# Altium PCB PCB1.PcbDoc
Units mm, origin at the board's own origin, x right, y up, seen from the top; angles counter-clockwise.
Board outline 100 x 85 mm, 2 copper layers (Top Layer, Bottom Layer); 80 components, 34 nets, 200 pads, 33 vias.
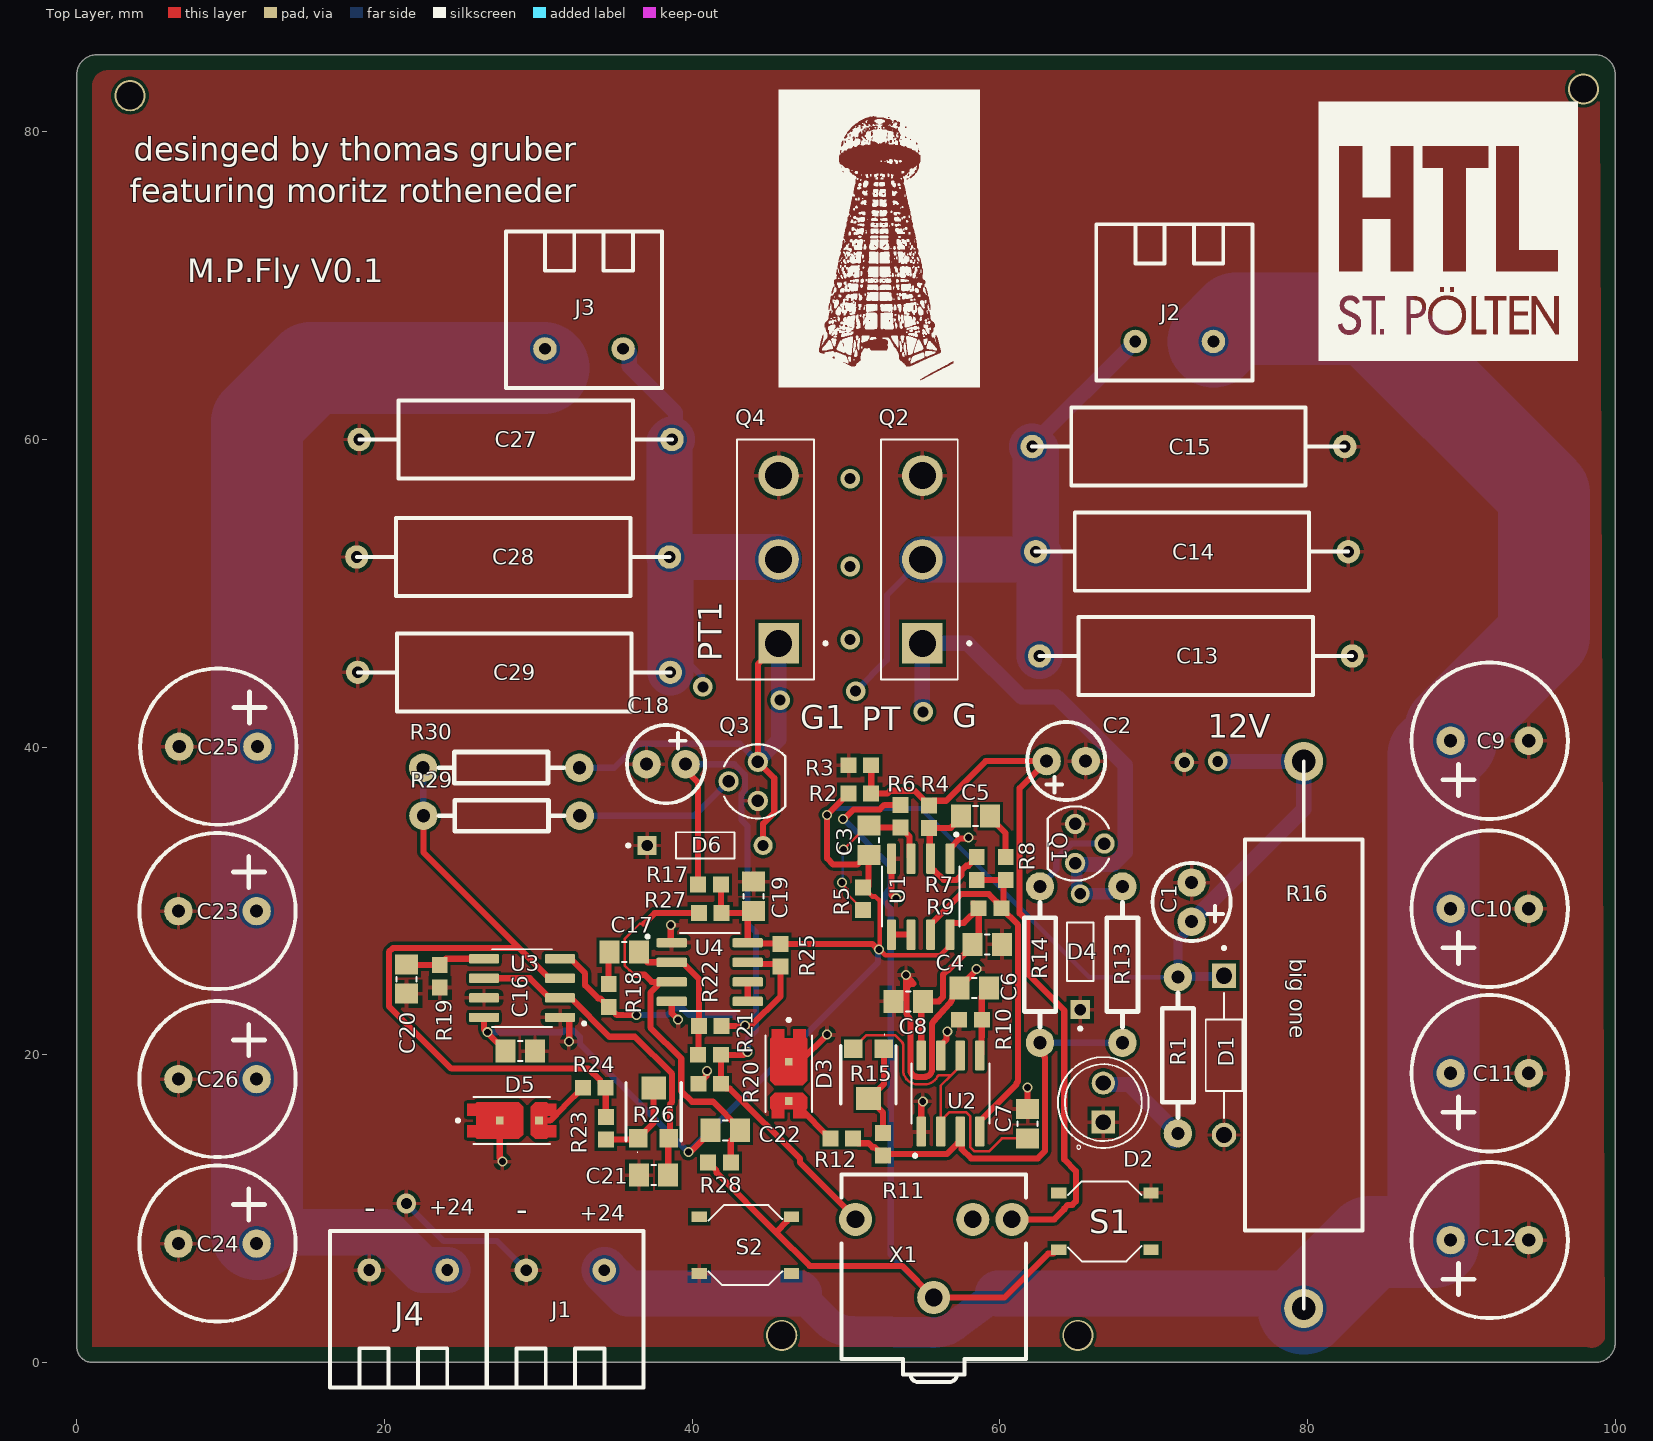
[diagram p0: Top Layer view]
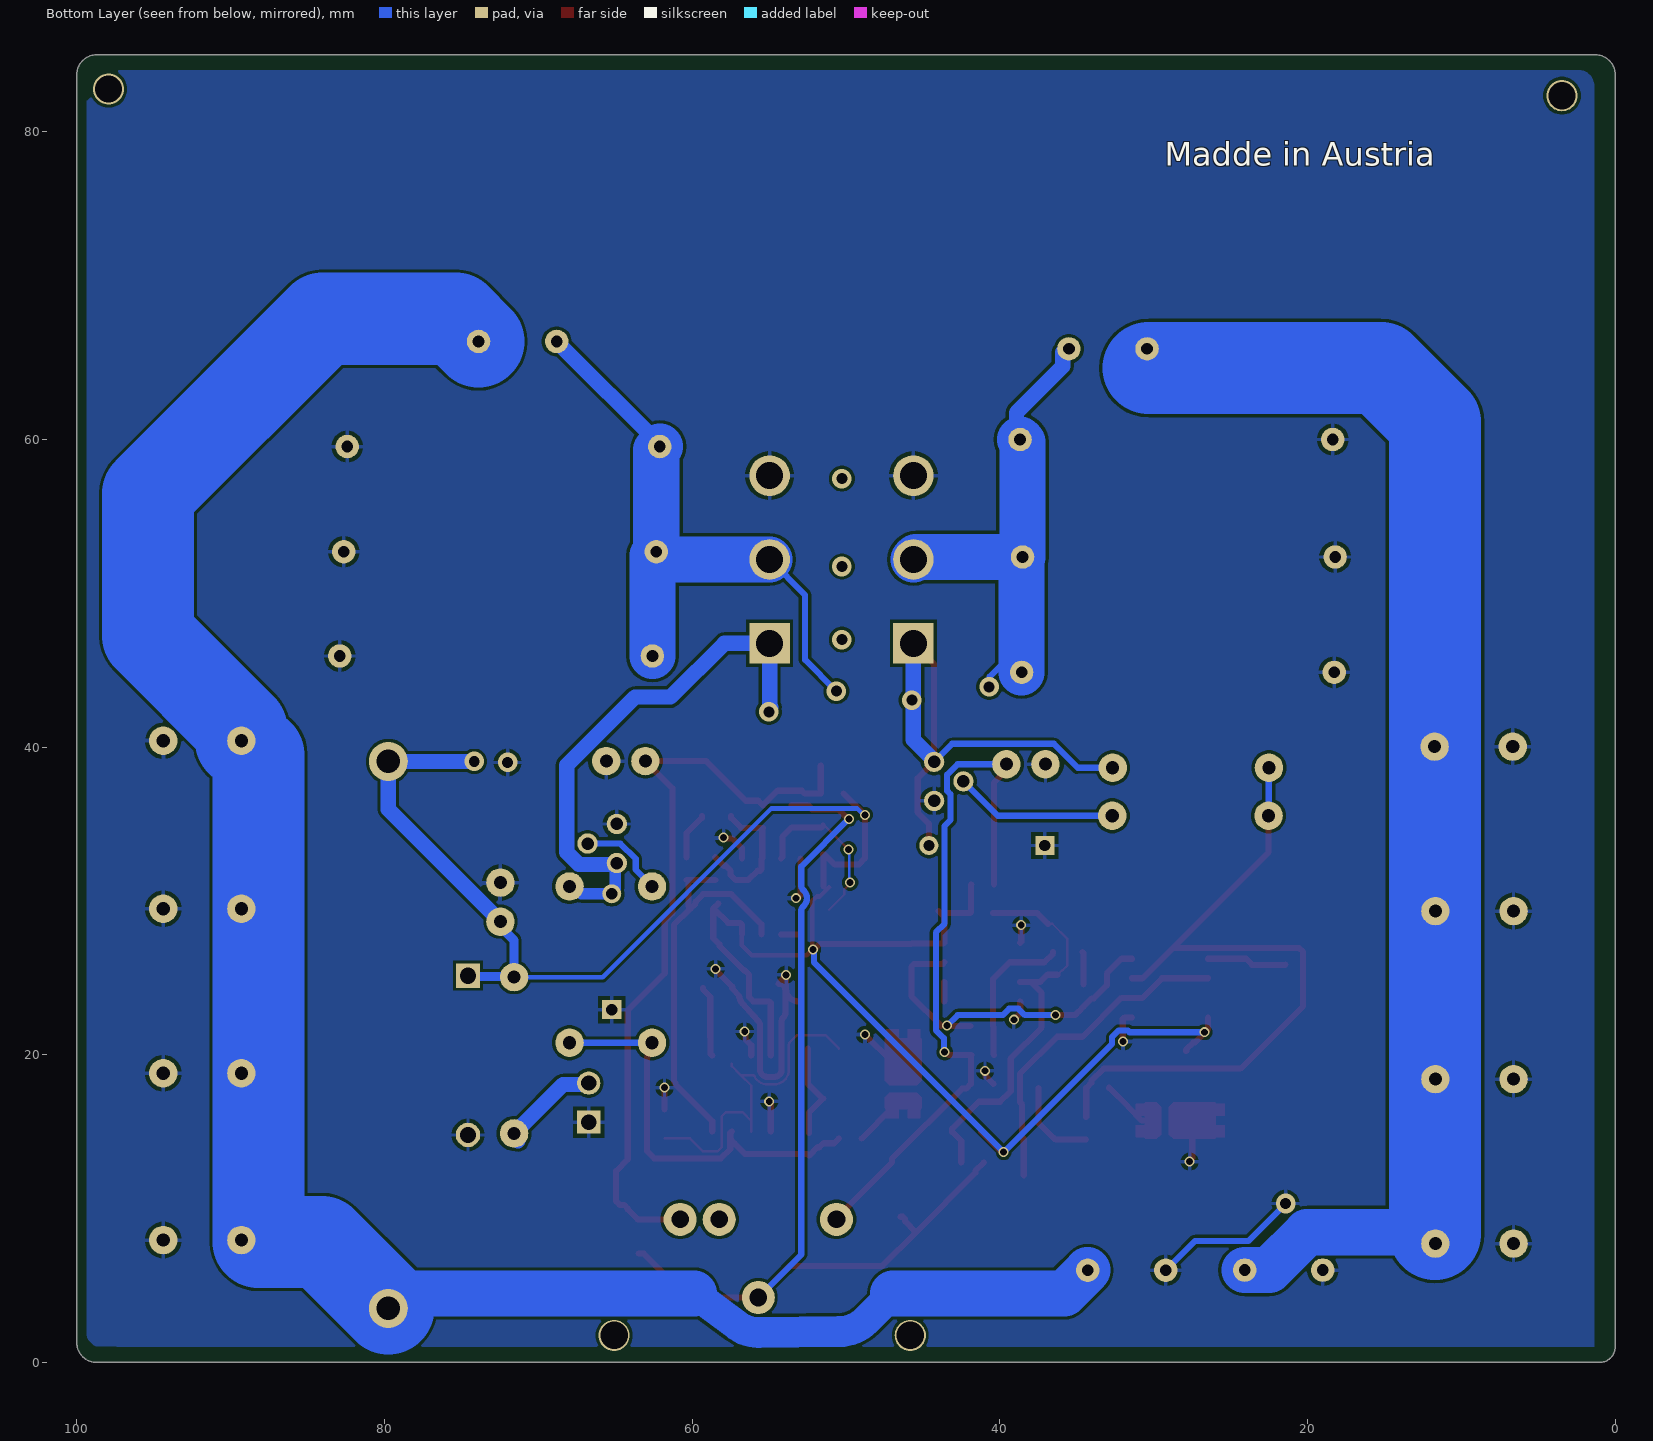
[diagram p1: Bottom Layer view, seen from below]

## Layer stack, top to bottom
Top Solder: solder mask 0.0102, Solder Resist, Dk 3.5
Top Layer: signal copper 0.0356
Dielectric 1: dielectric 0.32, FR-4, Dk 4.8
Bottom Layer: signal copper 0.0356
Bottom Solder: solder mask 0.0102, Solder Resist, Dk 3.5

## Board outline
1,0 cw(c1,1) 0,1 0,83.73 cw(c1.27,83.73) 1.27,85 98.73,85 cw(c98.73,83.73) 100,83.73 100,1.27 cw(c98.73,1.27) 98.73,0

## Design rules (kind name [scope] priority, off if disabled: settings)
Clearance [All] p1: gap=0.2 ignorepadtopadclearanceinfootprint=FALSE
HoleSize [All] p1: absolutevalues=TRUE maxlimit=6.1 minlimit=0.15 maxpercent=80.000 minpercent=20.000
MinimumAnnularRing MinimumAnnularRing_1 [All] p1: minimumring=0.254
PolygonConnect [All] p1: connectstyle=Relief reliefconductorwidth=0.254 reliefentries=4 polygonreliefangle="90 Angle" airgapwidth=0.254
RoutingVias [All] p1: holewidth=0.45 width=0.55 viastyle="Through Hole" minholewidth=0.35 minwidth=0.65 maxholewidth=0.95 maxwidth=1.95
SolderMaskExpansion [All] p1: expansion=0.102 istentingtop=FALSE
Width [All] p1: maxlimit=6 minlimit=0.16 preferedwidth=1 toplayer_prefwidth=0.4 minimp=50.000000 maximp=50.000000 favimp=50.000000
29 further rules are at their usual default settings.

## Components (designator, comment, footprint, x,y, rotation, side; value= is the part's Value field where it differs from the comment)
C1 "ELKO" RB-.1/.2 72.466,29.921 r270 top value=100u
C2 "ELKO" RB-.1/.2 64.313,39.091 r180 top value=10u
C3 "GCM21BR71H104KA37K" CAPC2012X135N 51.486,33.95 r270 top value=10n
C4 "GCM21BR71H104KA37K" CAPC2012X135N 59.182,27.178 r180 top value=100n
C5 "GCM21BR71H104KA37K" CAPC2012X135N 58.42,35.509 r180 top value=10n
C6 "GCM21BR71H104KA37K" CAPC2012X135N 58.344,24.333 r180 top value=10n
C7 "GCM21BR71H104KA37K" CAPC2012X135N 61.798,15.509 r90 top value=4.7n
C8 "10u" CAPC2012X135N 54.041,23.47 r0 top
C9 "ELKO" RB-.2/.4 91.846,40.411 r180 top value=470u
C10 "ELKO" RB-.2/.4 91.846,29.489 r180 top value=470u
C11 "ELKO" RB-.2/.4 91.846,18.796 r180 top value=470u
C12 "ELKO" RB-.2/.4 91.846,7.95 r180 top value=470u
C13 "Kondensator" Co 82.906,45.923 r180 top
C14 "Kondensator" Co 82.652,52.705 r180 top
C15 "Kondensator" Co 82.423,59.538 r180 top
C16 "10u" CAPC2012X135N 28.829,20.244 r180 top
C17 "GCM21BR71H104KA37K" CAPC2012X135N 35.585,26.67 r0 top value=10n
C18 "ELKO" RB-.1/.2 38.303,38.887 r0 top value=10u
C19 "GCM21BR71H104KA37K" CAPC2012X135N 43.993,30.302 r270 top value=100n
C20 "GCM21BR71H104KA37K" CAPC2012X135N 21.438,24.917 r270 top value=10n
C21 "GCM21BR71H104KA37K" CAPC2012X135N 37.49,12.168 r180 top value=4.7n
C22 "GCM21BR71H104KA37K" CAPC2012X135N 42.154,15.089 r180 top value=10n
C23 "ELKO" RB-.2/.4 9.144,29.337 r0 top value=470u
C24 "ELKO" RB-.2/.4 9.144,7.722 r0 top value=470u
C25 "ELKO" RB-.2/.4 9.195,40.03 r0 top value=470u
C26 "ELKO" RB-.2/.4 9.144,18.415 r0 top value=470u
C27 "Kondensator" Co 18.364,59.995 r0 top
C28 "Kondensator" Co 18.202,52.359 r0 top
C29 "Kondensator" Co 18.263,44.856 r0 top
D1 "1N4742A" DIOAD1036W78L463D272 74.574,19.964 r270 top
D2 "LED" LED_WP7113ID 66.726,16.891 r90 top value=Green
D3 "SPMWHT541MH7WAPKSB" LED_SPMWHT541MH7WAPKSB 46.279,18.768 r270 top
D4 "1N4148" DIOAD753W49L380D172B 65.227,26.695 r90 top
D5 "SPMWHT541MH7WAPKSB" LED_SPMWHT541MH7WAPKSB 28.27,15.723 r0 top
D6 "1N4148" DIOAD753W49L380D172B 40.843,33.604 r0 top
J1 "Buchse" Buchse1 34.29,5.994 r180 top
J2 "Buchse" Buchse1 68.809,66.37 r0 top
J3 "Buchse" Buchse1 30.429,65.888 r0 top
J4 "Buchse" Buchse1 24.08,6 r180 top
Q1 "BC327" SOT54A 64.897,33.731 r270 top
Q2 "IRFP260N" TO545P1560X500X2460-3 54.966,52.197 r90 top
Q3 "BC327" SOT54A 44.272,37.77 r90 top
Q4 "IRFP260N" TO545P1560X500X2460-3 45.618,52.197 r90 top
R1 "1/8W" Axial-0.4 71.577,19.964 r270 top value=2k2
R2 "RC0603FR-071ML" RESC1607X60N 50.902,36.982 r180 top value=1k
R3 "RC0603FR-071ML" RESC1607X60N 50.902,38.811 r0 top value=470
R4 "RC0603FR-071ML" RESC1607X60N 55.397,35.482 r90 top value=100
R5 "RC0603FR-071ML" RESC1607X60N 51.105,30.153 r90 top value=10k
R6 "RC0603FR-071ML" RESC1607X60N 53.543,35.508 r270 top value=100
R7 "RC0603FR-071ML" RESC1607X60N 58.496,32.106 r90 top value=10k
R8 "RC0603FR-071ML" RESC1607X60N 60.376,32.106 r90 top value=220
R9 "RC0603FR-071ML" RESC1607X60N 59.361,29.515 r180 top value=1k
R10 "RC0603FR-071ML" RESC1607X60N 58.091,22.276 r180 top value=33k
R11 "RC0603FR-071ML" RESC1607X60N 52.4,14.173 r270 top value=3k3
R12 "RC0603FR-071ML" RESC1607X60N 49.733,14.554 r0 top value=1k
R13 "1/4W" Axial-0.4 67.97,25.857 r270 top value=270
R14 "1/8W" Axial-0.4 62.611,25.857 r270 top value=470
R15 "TC33X-2-101E" TC33X2503E 51.46,18.694 r180 top
R16 "RES" PCBComponent_1 79.756,39.065 r270 top
R17 "RC0603FR-071ML" RESC1607X60N 41.123,31.064 r0 top value=1k
R18 "RC0603FR-071ML" RESC1607X60N 34.569,23.851 r90 top value=220
R19 "RC0603FR-071ML" RESC1607X60N 23.597,25.095 r270 top value=33k
R20 "RC0603FR-071ML" RESC1607X60N 41.15,18.11 r0 top value=470
R21 "RC0603FR-071ML" RESC1607X60N 41.124,19.99 r0 top value=100
R22 "RC0603FR-071ML" RESC1607X60N 41.175,21.869 r180 top value=10k
R23 "RC0603FR-071ML" RESC1607X60N 34.392,15.216 r90 top value=3k3
R24 "RC0603FR-071ML" RESC1607X60N 33.63,17.857 r0 top value=1k
R25 "RC0603FR-071ML" RESC1607X60N 45.745,26.467 r90 top value=1k
R26 "TC33X-2-101E" TC33X2503E 37.49,16.282 r0 top
R27 "RC0603FR-071ML" RESC1607X60N 41.175,29.21 r0 top value=10k
R28 "RC0603FR-071ML" RESC1607X60N 41.774,12.991 r0 top value=100
R29 "1/8W" Axial-0.4 27.61,35.535 r180 top value=470
R30 "1/4W" Axial-0.4 27.584,38.659 r180 top value=270
S1 "SMD-BUTTON(4P-5.2X5.2X1.5MM-SKQGAKE010)" SW4-SMD-5.2X5.2X1.5MM 66.827,9.169 r180 top
S2 "SMD-BUTTON(4P-5.2X5.2X1.5MM-SKQGAKE010)" SW4-SMD-5.2X5.2X1.5MM 43.459,7.62 r0 top
U1 "LM311DE4" SOIC127P599X175-8N 54.864,30.277 r270 top
U2 "NE555DR" SOIC127P599X175-8N 56.793,17.474 r90 top
U3 "NE555DR" SOIC127P599X175-8N 28.937,24.333 r180 top
U4 "LM311DE4" SOIC127P599X175-8N 41.142,25.375 r0 top
X1 "EJ035-4R-07R-1" EJ035-4R-07R-1 55.702,4.216 r180 top

## Footprints (in the part's own frame and the unit in brackets; to place one, negate y for a bottom-side part, rotate by r counter-clockwise, add the part's x,y. Pads: shape width x height; smd on the part's side, far side on the other; paste and mask are expansions set on the pad)
Axial-0.4 [mm]
  round 1.85 hole 0.85: 1(-5.08,0) 2(5.08,0)
  silkscreen extent -4.06,-1.02 4.06,1.02
Buchse1 [mil]
  round 60 hole 30: PIN1(0,0) PIN2(200,0)
  silkscreen extent -100,-100 300,300
CAPC2012X135N [mm]
  rect 1.3x1.5 smd: 1(-0.95,0) 2(0.95,0)
  silkscreen extent -0.15,-0.65 0.15,0.65
Co [mil]
  round 60 hole 30: PIN1(0,0) PIN2(800,0)
  silkscreen extent 0,-100 800,100
DIOAD753W49L380D172B [mm]
  round 1.238 hole 0.73: A(3.768,0)
  rect 1.238x1.238 / inner round 1.238 / far side rect 1.238x1.238 hole 0.73: K(-3.768,0)
  silkscreen extent -5.1,-0.86 1.9,0.86
DIOAD1036W78L463D272 [mm]
  rect 1.59x1.59 / inner round 1.59 / far side rect 1.59x1.59 hole 1.06: 1(-5.18,0)
  round 1.59 hole 1.06: 2(5.18,0)
  silkscreen extent -7.07,-1.19 4.07,1.19, body extent -5.69,-1.36 5.69,1.36, height 2.72
EJ035-4R-07R-1 [mm]
  round 2.15 hole 1.15: GND(0,0) L(-5.08,-5.08) R(5.08,-5.08) SW(-2.54,-5.08)
  silkscreen extent -6,-8 6,5.5
LED_SPMWHT541MH7WAPKSB [mm]
  rect 0.5x0.5 smd paste-1 mask+0: A(1.775,0) C(-0.775,0)
  Top Layer region: 0.75,0.91 0.75,-0.91 0.46,-1.2 -2.26,-1.2 -2.37,-1.1 -2.9,-1.1 -2.9,-0.3 -2.3,-0.3 -2.3,0.3 -2.9,0.3 -2.9,1.1 -2.37,1.1 -2.26,1.2 0.46,1.2
  Top Layer region: 2.37,1.1 2.9,1.1 2.9,0.3 2.3,0.3 2.3,-0.3 2.9,-0.3 2.9,-1.1 2.37,-1.1 2.26,-1.2 1.54,-1.2 1.25,-0.91 1.25,0.91 1.54,1.2 2.26,1.2
  silkscreen extent -3.6,-1.52 2.5,1.52
LED_WP7113ID [mm]
  round 1.508 hole 1: A(1.27,0)
  rect 1.508x1.508 / inner round 1.508 / far side rect 1.508x1.508 hole 1: C(-1.27,0)
  silkscreen extent -3.03,-2.95 2.95,2.95, body extent -2.5,-2.95 2.95,2.95, height 9.6
PCBComponent_1 [mil]
  round 100 hole 60: PIN1(0,0) PIN2(1400,0)
  silkscreen extent 0,-150 1400,150
RB-.1/.2 [mm]
  round 1.85 hole 0.85: 1(1.27,0) 2(-1.27,0)
  silkscreen extent -2.54,-2.54 2.54,2.54
RB-.2/.4 [mm]
  round 1.85 hole 0.85: 1(2.54,0) 2(-2.54,0)
  silkscreen extent -5.08,-5.08 5.08,5.08
RESC1607X60N [mm]
  rect 1.04x1.02 smd: 1(-0.735,0) 2(0.735,0)
SOIC127P599X175-8N [mm]
  rrect25% 1.97x0.6 smd: 1(-2.47,1.905) 2(-2.47,0.635) 3(-2.47,-0.635) 4(-2.47,-1.905) 5(2.47,-1.905) 6(2.47,-0.635) 7(2.47,0.635) 8(2.47,1.905)
  silkscreen extent -4.14,-2.52 1.95,2.52, body extent -3,-2.45 3,2.45, height 1.75
SOT54A [mil]
  round 52 hole 32: B(0,75) C(-50,0) E(50,0)
  silkscreen extent -95,-70 95,87, body extent -94,-60 94,94, height 305
SW4-SMD-5.2X5.2X1.5MM [mm]
  rect 1x0.7 smd: 1(-3,1.85) 2(3,1.85) 3(-3,-1.85) 4(3,-1.85)
  silkscreen extent -2.4,-2.6 2.4,2.6
TC33X2503E [mm]
  rect 1.2x1.2 smd: 1(-1,-1.7) 3(1,-1.7)
  rect 1.6x1.5 smd: 2(0,1.55)
  silkscreen extent -1.8,-2.64 1.8,1.9, body extent -1.5,-2 1.5,1.8, height 1.22
TO545P1560X500X2460-3 [mm]
  rect 2.64x2.64 hole 1.76: 1(-5.45,0)
  round 2.64 hole 1.76: 2(0,0) 3(5.45,0)
  silkscreen extent -7.8,-3.15 7.8,2.7, body extent -7.8,-2.3 7.8,2.7, height 35.1

## Part data
C1 C2 C9 C10 C11 C12 C18 C23 C24 C25 C26: "Elko"
C3 C4 C6 C7 C19 C20 C21 C22: "SMD Capacitor X7R(EIA) with Capacitance: 0.10uF Tol. 10%. Rated Voltage: 50Vdc", Package="0805 Murata", Arrow_Electronics-Purchase-URL=https://snapeda.com/shop?store=Arrow+Electronics&id=1764792, Availability=Good, Check_prices=https://www.snapeda.com/parts/GCM21BR71H104KA37K/Murata%20Electronics%20North%20America/view-part/1764792/?ref=eda, DigiKey-Purchase-URL=https://snapeda.com/shop?store=DigiKey&id=1764792, MF=Murata, MP=GCM21BR71H104KA37K, Price=None, SnapEDA_Link=https://www.snapeda.com/parts/GCM21BR71H104KA37K/Murata%20Electronics%20North%20America/view-part/1764792/?ref=snap
C5 C17: Package="0805 Murata", Arrow_Electronics-Purchase-URL=https://snapeda.com/shop?store=Arrow+Electronics&id=1764792, Availability=Good, Check_prices=https://www.snapeda.com/parts/GCM21BR71H104KA37K/Murata%20Electronics%20North%20America/view-part/1764792/?ref=eda, DigiKey-Purchase-URL=https://snapeda.com/shop?store=DigiKey&id=1764792, MF=Murata, MP=GCM21BR71H104KA37K, Price=None, SnapEDA_Link=https://www.snapeda.com/parts/GCM21BR71H104KA37K/Murata%20Electronics%20North%20America/view-part/1764792/?ref=snap
C8 C16: library part GCM21BR71H104KA37K, "SMD Capacitor X7R(EIA) with Capacitance: 0.10uF Tol. 10%. Rated Voltage: 50Vdc", Package="0805 Murata", Arrow_Electronics-Purchase-URL=https://snapeda.com/shop?store=Arrow+Electronics&id=1764792, Availability=Good, Check_prices=https://www.snapeda.com/parts/GCM21BR71H104KA37K/Murata%20Electronics%20North%20America/view-part/1764792/?ref=eda, DigiKey-Purchase-URL=https://snapeda.com/shop?store=DigiKey&id=1764792, MF=Murata, MP=GCM21BR71H104KA37K, Price=None, SnapEDA_Link=https://www.snapeda.com/parts/GCM21BR71H104KA37K/Murata%20Electronics%20North%20America/view-part/1764792/?ref=snap
D1: "Zener Diode 12 V 1 W Â±5% Through Hole DO-41", Package="DO-41 ON Semiconductor", Check_prices=https://www.snapeda.com/parts/1N4742A/Onsemi/view-part/?ref=eda, MF=ON, MP=1N4742A, SnapEDA_Link=https://www.snapeda.com/parts/1N4742A/Onsemi/view-part/?ref=snap
D2: library part WP7113ID, "Red 617nm LED Indication - Discrete 2V Radial", Package="Radial Kingbright", Availability="In Stock", Check_prices=https://www.snapeda.com/parts/WP7113ID/Kingbright/view-part/?ref=eda, MF=Kingbright, MP=WP7113ID, Price=None, Purchase-URL=https://pricing.snapeda.com/search/part/WP7113ID/?ref=eda, SnapEDA_Link=https://www.snapeda.com/parts/WP7113ID/Kingbright/view-part/?ref=snap
D3 D5: "LED LM561B PLUS WHITE 5630", Package=None, Check_prices=https://www.snapeda.com/parts/SPMWHT541MH7WAPKSB/Samsung+Semiconductor%252C+Inc./view-part/?ref=eda, MF="Samsung Semiconductor, Inc.", MP=SPMWHT541MH7WAPKSB, SnapEDA_Link=https://www.snapeda.com/parts/SPMWHT541MH7WAPKSB/Samsung+Semiconductor%252C+Inc./view-part/?ref=snap
D4 D6 U2 U3: Package=None, Availability=Unavailable, Price=None
  D4 D6: MP=1N4148
  U2 U3: MF="{'manufacturer': u'Texas Instruments'}", MP=NE555DR
Q1 Q3: "Bipolar (BJT) Transistor PNP 45V 800mA 260MHz 625mW Through Hole TO-92 (TO-226)", Package="E-PKG AXIAL-LEADED-2 ON Semiconductor", Availability="In Stock", Check_prices=https://www.snapeda.com/parts/BC327/Onsemi/view-part/?ref=eda, MF="ON Semiconductor", MP=BC327, Price=None, Purchase-URL=https://pricing.snapeda.com/search/part/BC327/?ref=eda, SnapEDA_Link=https://www.snapeda.com/parts/BC327/Onsemi/view-part/?ref=snap
Q2 Q4: "N-Channel 200V 50A (Tc) 300W (Tc) Through Hole TO-247AC", Package="TO-247-3 Infineon Technologies", Availability=Unavailable, Check_prices=https://www.snapeda.com/parts/IRFP260N/Infineon%20Technologies/view-part/2777552/?ref=eda, MF="Infineon Technologies", MP=IRFP260N, Price=None, SnapEDA_Link=https://www.snapeda.com/parts/IRFP260N/Infineon%20Technologies/view-part/2777552/?ref=snap
R1 R13 R14 R29 R30: library part RES, "Widerstand"
R2 R3 R4 R5 R6 R7 R8 R9 R10 R11 R12 R17 R18 R19 R20 R21 R22 R23 R24 R25 R27 R28: "Thick film general purpose", Package=None, Availability=Unavailable, MF="{'manufacturer': u'YAGEO'}", MP=RC0603FR-071ML, Price=None
R15 R26: "Resistor", Manufacturer_Name=Bourns, Mouser Part Number=652-TC33X-2-101E, Arrow Part Number=TC33X-2-101E, Arrow Price/Stock=https://www.arrow.com/en/products/tc33x-2-101e/bourns?region=nac, Datasheet Link=https://www.bourns.com/pdfs/TC33.pdf, Height=1.2mm, Manufacturer_Part_Number=TC33X-2-101E, Mouser Price/Stock=https://www.mouser.co.uk/ProductDetail/Bourns/TC33X-2-101E/?qs=Y%252BBfgPVcerSfRO2kwQB%2F8g%3D%3D
R16: VALUE==330
S1 S2: "Switch Tactile N.O. SPST Button Gull Wing 0.05A 12VDC 3.43N SMD T/R", Package=None, Availability=Unavailable, MF=ALPS, MP=SKQGAKE010, Price=None, SnapEDA_Link=https://www.snapeda.com/parts/SKQGAKE010/ALPS/view-part/51324/?ref=snap
U1 U4: "High Speed, 30V, Differential Comparator With Strobes 8-SOIC 0 to 70", Package="SOIC-8 Texas Instruments", Check_prices=https://www.snapeda.com/parts/LM311DE4/Texas+Instruments/view-part/?ref=eda, Digi-Key_Part_Number=2156-LM311DE4-ND, MF="Texas Instruments", MP=LM311DE4, Purchase-URL=https://pricing.snapeda.com/search/part/LM311DE4/?ref=eda, SnapEDA_Link=https://www.snapeda.com/parts/LM311DE4/Texas+Instruments/view-part/?ref=snap
X1: library part "3.5mm Klinke Stereo", "HTL-Schnorr-Elektronik"

## Free pads (board coordinates)
  round 2.032 hole 1.778: 7(3.454,82.347) 8(97.942,82.779) 9(65.075,1.753) 11(45.822,1.753)

## Via types
v1: diameter 0.65, hole 0.45, Top Layer to Bottom Layer, 23 vias
v2: diameter 1.27, hole 0.711, Top Layer to Bottom Layer, 10 vias

## Nets (pads, with @x,y where several pads share a name; then routed paths per layer and width w, separated by ;. In a path a pad name is that pad's centre, name@x,y a point inside that pad or via, vN(x,y) a via of type N, cw(c..) or ccw(c..) an arc to the next point about the centre after c; other vN are vias at no path point)
+12: C1.1 C3.2 C4.2 C8.2 C16.2 C19.2 C22.2 D1.1 R1.1 R2.2 R5.2 R9.2 R16.PIN1 R17.2 R25.2 R27.2 U1.8 U2.8 U3.8 U4.8 | length 143.4
  Top Layer w0.3: R5.2 51.105,30.878 51.695,30.288 51.907,30.288 52.187,30.007 52.187,26.843 52.558,26.472 56.119,26.472 56.769,27.122 U1.8
  Top Layer w0.4: v1@26.467,21.656 U3.8 ; v1@26.678,21.445 27.329,20.794 27.429,20.794 27.879,20.344 C16.2 ; v1(39.751,13.665) 39.799,13.713 39.928,13.713 41.204,14.989 C22.2 ; R17.2 41.884,31.038 41.884,29.236 R27.2 C19.2@43.851,29.21 ; C19.2 C19.2@43.851,29.21 ; R2.2 50.157,36.982 v1(48.768,35.594) 48.768,32.766 49.174,32.36 50.746,32.36 51.386,33 C3.2 ; R5.2@51.46,30.936 C3.2@51.46,32.974 ; v1(52.137,26.838) 52.069,26.838 51.705,27.202 R25.2 45.706,27.241 43.651,27.241 U4.8 43.612,28.971 C19.2@43.851,29.21 ; U2.8 54.888,23.366 C8.2 56.026,23.47 56.302,23.746 56.302,25.207 56.578,25.483 56.637,25.483 58.232,27.078 C4.2 58.626,27.572 R9.2 R9.2@58.616,29.515 ; U1.8 56.769,28.467 56.869,28.567 57.669,28.567 R9.2@58.616,29.515 ; R9.2@58.306,29.825 R9.2@58.616,29.515
  Bottom Layer w0.3: v1(48.768,35.594) 48.863,35.594 49.275,36.006 54.863,36.006 65.825,25.044 R1.1
  Bottom Layer w0.4: v1(26.695,21.463) 31.563,21.463 31.678,21.578 32.279,21.578 32.704,21.154 32.704,20.713 v1(39.751,13.665) 52.089,26.003 52.089,26.79 v1(52.137,26.838)
  Bottom Layer w0.6: C1.1 72.466,28.313 71.577,27.424 R1.1 71.627,25.094 74.524,25.094 D1.1
  Bottom Layer w1: C1.1 79.756,35.941 R16.PIN1 v2(74.168,39.065) v2@74.143,39.091
+24: C9.1 C10.1 C11.1 C12.1 J1.PIN1 J2.PIN2 R16.PIN2 | length 135.5
  Bottom Layer w2: 46.947,4.469 48.673,2.743 ccw(c50.467,4.54) 50.44,2 55.675,1.942 ccw(c55.702,4.216) 57.054,2.386 59.878,4.468 cw(c61.064,2.858) 59.879,4.469
  Bottom Layer w3: J1.PIN1 35.816,4.469 46.947,4.469 ; 59.879,4.469 78.793,4.469 R16.PIN2
  Bottom Layer w6: J2.PIN2 75.362,67.843 84.023,67.843 95.377,56.49 95.377,47.236 89.306,41.165 C9.1 ; R16.PIN2 84.074,7.823 88.189,7.823 88.189,39.472
+24v1: C23.1 C24.1 C25.1 C26.1 J3.PIN1 J4.PIN1 | length 87.2
  Bottom Layer w1: C24.1@11.709,8.357 C24.1@12.319,8.357
  Bottom Layer w3: C24.1 12.319,8.357 12.424,8.462 20.02,8.462 22.482,6 J4.PIN1
  Bottom Layer w6: C24.1@11.709,8.357 11.709,61.128 15.224,64.643 30.328,64.643
GND: C1.2 C2.2 C4.1 C6.2 C7.2 C8.1 C9.2 C10.2 C11.2 C12.2 C13.PIN1 C14.PIN1 C15.PIN1 C16.1 C18.2 C19.1 C20.2 C21.2 C23.2 C24.2 C25.2 C26.2 C27.PIN1 C28.PIN1 C29.PIN1 D1.2 D2.C D3.C D4.K D5.C D6.K J1.PIN2 J4.PIN2 Q1.C Q2.3 Q3.C Q4.3 R3.1 R10.2 R19.2 R20.1 S1.3 S2.3 U1.1 U1.4 U2.1 U2.7 U3.1 U3.7 U4.1 U4.4 | length 49.8
  Top Layer w0.4: D5.C 27.495,13.289 27.661,13.123 v1(27.661,13.056) ; U3.1 31.904,22.428 32.004,22.328 32.004,20.879 v1(31.979,20.853) ; v1(38.608,28.423) 38.608,27.343 U4.1 ; U4.4 38.672,22.695 v1(39.091,22.276) ; R20.1 40.425,18.11 40.914,18.6 40.914,18.91 v1(40.962,18.957) ; D3.C 47,19.543 v1(48.768,21.311) ; U1.4 52.959,30.48 ccw(c53.264,30.48) v1(53.264,30.175) ; C8.1 ccw(c53.091,24.277) 53.899,24.277 v1(53.899,25.197) 54.316,24.701 cw(c54.01,24.444) 54.369,24.62 54.341,24.62 ccw(c54.341,24.22) 53.941,24.22 53.941,22.72 ccw(c54.341,22.72) 54.065,22.43 cw(c53.788,22.142) 54.188,22.142 54.188,19.034 ccw(c54.663,19.034) 54.663,18.559 55.113,18.559 ccw(c55.113,19.034) 55.588,19.034 55.588,21.911 cw(c55.988,21.911) 55.692,22.18 56.746,23.342 ccw(c56.302,23.746) 56.873,23.563 56.944,23.783 C6.2 57.394,24.433 58.423,25.462 58.423,25.531 v1(58.47,25.579) ; U2.1 54.888,16.796 54.991,16.9 v1(54.991,16.967) ; U2.7 56.158,20.629 56.535,21.006 56.535,21.464 v1(56.582,21.512) ; U1.1 56.769,33.432 57.402,34.064 57.915,34.064 v1(57.963,34.112) ; C7.2 v1(61.798,17.856)
  Bottom Layer w0.4: v2(21.424,10.328) 21.424,10.301 23.825,7.9 27.304,7.9 J1.PIN2
  other v2: 72,39
NetC2_1: C2.1 R2.1 R3.2 R4.2 X1.L | length 50.4
  Top Layer w0.4: R3.2 R2.1 52.687,36.982 52.868,37.163 54.462,37.163 55.397,36.227 R4.2 55.692,36.512 56.507,36.512 59.086,39.091 C2.1 61.286,37.334 61.286,29.184 61.782,28.688 61.782,25.29 64.186,22.886 64.186,13.198 64.947,12.437 64.947,10.472 64.712,10.237 64.42,10.237 64.186,10.003 64.186,9.945 63.537,9.296 X1.L
NetC3_1: C3.1 R5.1 R6.2 U1.3 | length 11.3
  Top Layer w0.16: v1(49.733,31.191) 49.733,31.126 50.1,30.759 50.1,30.432 51.105,29.428 R5.1 ; v1@49.784,33.299 v1(49.835,33.35) v1(49.835,33.35) 51.386,34.9 C3.1
  Top Layer w0.4: C3.1 51.613,34.773 R6.2 53.543,34.763 54.129,34.177 54.129,32.847 U1.3
  Bottom Layer w0.16: v1(49.733,31.191) 49.733,31.318 49.784,31.369 49.784,33.299 v1(49.835,33.35)
NetC5_1: C5.1 R8.2 | length 3.1
  Top Layer w0.4: C5.1 59.37,35.409 60.376,34.403 R8.2
NetC5_2: C5.2 R4.1 R7.2 U1.2 | length 9.3
  Top Layer w0.4: C5.2 57.47,35.409 56.808,34.747 R4.1 55.448,34.696 55.448,32.798 U1.2 55.499,32.062 55.599,31.962 55.747,31.962 56.347,31.362 57.191,31.362 57.506,31.677 57.506,31.976 57.821,32.291 57.956,32.291 58.496,32.831 R7.2
NetC6_1: C6.1 R10.1 U2.5 | length 4.6
  Top Layer w0.4: U2.5 58.798,20.044 58.798,21.137 58.826,21.166 R10.1 58.826,23.766 59.294,24.233 C6.1
NetC7_1: C7.1 R15.3 U2.2 U2.6 | length 22.8
  Top Layer w0.16: R15.3 51.34,21.274 53.176,21.274 53.661,20.79 ; 53.661,20.789 cw(c53.547,20.677) 53.707,20.677 53.708,19.034 ccw(c54.663,19.034) 54.663,18.079 55.113,18.079 ccw(c55.113,19.034) 55.943,18.562 55.964,18.598 cw(c56.103,18.519) 56.101,18.679 ; 56.102,18.679 56.848,18.679 ; U2.2 U2.2@56.158,15.689 ; U2.6@57.428,19.424 57.428,19.259 56.848,18.679 ; C7.1 60.137,14.559 59.317,13.739 58.326,13.739 58.063,14.002 58.063,16.006 57.8,16.269 56.738,16.269 U2.2@56.158,15.689 ; U2.2@56.158,15.689 56.158,17.989 56.848,18.679
NetC17_1: C17.1 R18.2 | length 2.1
  Top Layer w0.4: R18.2 34.569,26.604 C17.1
NetC17_2: C17.2 R21.1 R22.2 U4.2 | length 9.6
  Top Layer w0.4: C17.2 36.535,26.57 37.096,26.01 U4.2 39.357,26.01 40.44,24.926 R22.2 40.415,21.844 40.415,20.015 R21.1
NetC18_1: C18.1 R17.1 R20.2 R21.2 X1.R | length 47.3
  Top Layer w0.4: C18.1 39.573,38.495 40.388,37.681 R17.1 ; v1(43.586,20.168) 43.519,20.168 43.341,19.99 R21.2 41.872,19.977 41.872,18.123 R20.2 42.195,17.8 42.458,17.8 47,13.259 47,12.995 50.622,9.373 X1.R
  Bottom Layer w0.4: C18.1 42.749,38.887 43.428,38.209 43.428,37.155 43.212,36.939 43.212,35.249 43.586,34.874 43.586,28.521 44.159,27.948 44.159,21.594 43.634,21.07 43.634,20.215 v1(43.586,20.168)
NetC20_1: C20.1 R19.1 U3.5 | length 5.2
  Top Layer w0.4: C20.1 21.475,25.83 R19.1 23.597,25.84 23.995,26.238 U3.5
NetC21_1: C21.1 R26.3 U3.2 U3.6 | length 21.5
  Top Layer w0.4: U3.6 29.452,24.968 30.722,23.698 U3.2 32.092,23.698 34.617,21.173 36.265,21.173 38.69,18.748 38.69,16.916 38.548,16.774 38.548,14.639 R26.3 38.44,14.532 C21.1
NetC22_1: C22.1 R27.1 R28.2 U4.3 | length 26.3
  Top Layer w0.16: 36.246,25.197 35.942,25.5 35.909,25.5 35.605,25.804 35.605,27.536 36.588,28.519 36.874,28.519
  Top Layer w0.4: 36.246,25.197 36.907,25.197 37.365,24.74 U4.3@37.987,24.74 ; 36.874,28.519 37.565,29.21 R27.1@40.45,29.21 ; U4.3 U4.3@37.987,24.74 ; R28.2 42.509,14.394 43.104,14.989 C22.1 43.104,15.189 41.354,16.939 39.99,16.939 39.29,17.639 39.29,19.763 37.287,21.767 37.287,24.04 U4.3@37.987,24.74
NetD2_A: D2.A R1.2 | length 6.8
  Bottom Layer w1: D2.A 66.823,18.064 68.398,18.064 R1.2 71.577,14.654 R1.2@71.323,14.4
NetD3_A: D3.A R12.1 | length 3.4
  Top Layer w0.4: 46.888,17.097 46.938,17.047 46.938,16.604 48.988,14.554 R12.1
NetD4_A: D4.A Q1.E Q2.1 R13.1 | length 34.9
  Bottom Layer w0.75: Q1.E@65.006,32.352 65.006,30.817 65.227,30.596 D4.A 67.199,30.464 67.673,30.937 R13.1
  Bottom Layer w1: v2@54.889,42.596 54.966,42.672 Q2.1 57.914,46.747 61.406,43.255 63.716,43.255 68.162,38.809 68.162,33.168 67.365,32.371 65.074,32.371 64.984,32.461 Q1.E
  other v2: 55.016,42.291
NetD5_A: D5.A R24.1 | length 3.7
  Top Layer w0.4: D5.A 30.76,15.723 31.667,16.63 31.667,16.64 32.885,17.857 R24.1
NetD6_A: D6.A Q3.E Q4.1 R30.1 | length 35.4
  Top Layer w0.4: D6.A 44.612,35.025 45.333,35.745 45.333,37.979 Q3.E 44.272,45.401 Q4.1
  Bottom Layer w0.4: R30.1 34.931,38.659 36.484,40.212 43.1,40.212 Q3.E
  Bottom Layer w1: Q3.E 44.272,39.127 45.618,40.473 Q4.1
  other v2: 45.72,43.053
NetQ1_B: Q1.B R14.1 | length 5.8
  Bottom Layer w0.4: R14.1 62.611,30.97 63.673,32.032 63.673,32.737 64.667,33.731 Q1.B
NetQ3_B: Q3.B R29.1 | length 10.6
  Bottom Layer w0.4: R29.1 40.132,35.535 Q3.B
NetR6_1: R6.1 R28.1 S1.2 S2.2 X1.GND | length 66.8
  Top Layer w0.4: R28.1 41.049,12.991 41.589,12.451 41.589,12.315 45.447,8.457 47.637,6.267 48.311,6.267 53.652,6.267 X1.GND 60.291,4.216 63.147,7.072 S1.2@63.497,7.072 ; 45.491,8.413 45.491,8.502 46.159,9.17 46.159,9.32 46.309,9.47 S2.2 ; v1(49.809,35.331) 49.877,35.331 50.495,35.95 52.199,35.95 52.492,36.243 R6.1
  Bottom Layer w0.4: v1(49.809,35.331) 52.91,32.231 52.91,31.01 cw(c52.51,31.01) 52.779,30.714 ccw(c53.264,30.175) 52.778,29.637 cw(c52.51,29.34) 52.91,29.34 52.91,7.008 X1.GND
NetR7_1: R7.1 R8.1 R9.1 U1.7 U2.4 | length 26.4
  Top Layer w0.4: U1.7 55.499,28.492 57.452,30.445 59.292,30.445 59.776,29.96 59.776,29.825 60.086,29.515 R9.1 ; R7.1 R8.1 60.236,31.231 60.236,29.654 R9.1 ; U2.4 58.698,15.689 61.073,18.065 61.073,18.157 61.182,18.265 61.182,28.439 60.106,29.515 R9.1
NetR11_1: R11.1 R15.1 R15.2 | length 6.3
  Top Layer w0.4: R15.2 R15.2@51.51,17.144 ; R11.1 52.4,16.255 R15.2@51.51,17.144 ; R15.1 52.46,18.094 R15.2@51.51,17.144
NetR11_2: R11.2 R12.2 R13.2 R14.2 U2.3 | length 27.5
  Top Layer w0.4: R12.2 50.778,14.244 51.469,14.244 51.725,13.988 51.86,13.988 52.4,13.448 R11.2 52.5,13.538 56.547,13.538 57.228,14.219 57.328,14.219 57.428,14.319 U2.3@57.428,14.419 ; U2.3 57.528,14.904 57.528,13.858 58.127,13.259 62.464,13.259 62.948,13.744 62.948,19.818 62.888,19.878 62.888,20.5 R14.2
  Bottom Layer w0.4: R14.2 R13.2
NetR18_1: R18.1 R22.1 R25.1 U3.4 U4.7 | length 23.1
  Top Layer w0.4: U3.4 32.092,26.238 33.043,25.287 33.043,24.517 33.894,23.666 34.029,23.666 34.569,23.126 R18.1 34.569,23.106 34.879,22.796 34.889,22.796 35.104,22.581 v1(36.373,22.581) ; R22.1 v1@43.434,21.869 ; U4.7 43.712,25.91 45.568,25.91 R25.1 45.745,23.796 43.818,21.869
  Bottom Layer w0.4: v1(36.373,22.581) 38.37,22.581 38.79,23.001 39.391,23.001 39.811,22.581 42.748,22.581 v1(43.434,21.895)
NetR23_1: R23.1 R26.1 R26.2 | length 5.8
  Top Layer w0.4: R23.1 36.389,14.481 R26.1 37.49,15.582 R26.2
NetR23_2: R23.2 R24.2 R29.2 R30.2 U3.3 | length 48.1
  Top Layer w0.4: R29.2 22.53,33.16 28.752,26.938 ; U3.3 30.722,24.968 28.752,26.938 ; R23.2 34.378,15.964 34.378,17.844 R24.2 34.355,17.857 34.045,18.167 34.045,18.303 33.254,19.094 24.346,19.094 20.288,23.152 20.288,26.683 20.543,26.938 28.752,26.938
  Bottom Layer w0.4: R30.2 22.517,38.646 22.517,35.547 R29.2
NetU1_5: U1.5 U1.6 | length 1.3
  Top Layer w0.4: U1.5 U1.6
NetU4_5: U4.5 U4.6 | length 1.3
  Top Layer w0.4: U4.5 U4.6
PT: C13.PIN2 C14.PIN2 C15.PIN2 J2.PIN1 Q2.2 | length 40.1
  Bottom Layer w0.4: v2(50.622,43.637) 52.654,45.669 52.654,49.886 Q2.2
  Bottom Layer w1: C15.PIN2@62.039,59.601 J2.PIN1 J2.PIN1@68.882,66.444
  Bottom Layer w3: Q2.2 61.214,52.197 ; C15.PIN2 62.332,59.309 C14.PIN2 62.586,52.451 C13.PIN2
PT1: C27.PIN2 C28.PIN2 C29.PIN2 J3.PIN2 Q4.2 | length 31.8
  Bottom Layer w0.4: 39.484,45.758 40.668,44.574 40.668,43.939 v2@40.716,43.891
  Bottom Layer w1: J3.PIN2@35.814,65.761 35.914,65.66 35.914,64.746 38.913,61.747 C27.PIN2@38.913,59.995
  Bottom Layer w3: C29.PIN2 38.583,52.299 C28.PIN2 ; C27.PIN2 38.522,59.833 C28.PIN2 ; Q4.2 45.457,52.359 C28.PIN2
  other v2: 40.692,43.915
pads on no net: S1.1 S1.4 S2.1 S2.4 X1.SW
copper on no net:
  other v2: 50.267,46.99 50.267,51.74 50.267,57.455

## Polygon pours and split planes (outlines as drawn)
GND on Bottom Layer "GND_L02_P001" (solid, pour order 1): 1.372,83 cw(c2.372,83) 1.665,83.707 1.734,83.777 cw(c2.273,83.238) 2.273,84 97.372,84 99.327,82.045 cw(c99.22,81.937) 99.372,81.937 99.372,1.801 cw(c99.241,1.801) 99.333,1.708 cw(c98.945,1.708) 99.22,1.434 98.938,1.152 cw(c98.664,1.427) 98.664,1.038 97.465,1.038 ccw(c97.465,0.907) 97.372,1 1.372,1
GND on Top Layer "GND_L01_P000" (solid, pour order 0): 1,83 cw(c2,83) 2,84 98,84 cw(c98,83) 99,83 99.319,1.536 cw(c98.457,1.861) 98.132,1 1,1

## Silkscreen, mask and mechanical layers (free items; w line width, h text height)
Top Overlay:
  drawing of 284 lines, arcs and shapes, not listed
  text "desinged by thomas gruber" at 3.708,78.105 h1.52
  text "featuring moritz rotheneder" at 3.429,75.412 h1.52
  text "M.P.Fly V0.1" at 7.188,70.231 h1.52
  text "PT1" at 41.91,45.568 h1.52 r90
  text "G" at 56.896,41.275 h1.52
  text "G1" at 47.041,41.199 h1.52
  text "PT" at 51.029,41.097 h1.52
  text "12V" at 73.508,40.615 h1.52
  text "+24" at 22.911,9.601 h1.02
  text "-" at 18.694,9.347 h1.52
  text "-" at 28.55,9.195 h1.52
  text "+24" at 32.69,9.195 h1.02
Bottom Overlay:
  text "Madde in Austria" at 29.286,77.8 h1.52
Boardshape:
  the board outline again, w0.254

## Dimensions
0,83.73 to 100,83.73 on dimensions
1.27,85 to 1,0 on dimensions

## Text inside footprints (layer, text, board x,y; h text height)
R16: Top Overlay "big one" at 78.85,26.238 h1.02 r270